# Altium PCB IMU6050-Copy.PcbDoc
Units mm, origin at the board's own origin, x right, y up, seen from the top; angles counter-clockwise.
Board outline 152.4 x 101.6 mm, 2 copper layers (Top Layer, Bottom Layer); 42 components, 29 nets, 166 pads, 13 vias.
Unrouted connection lines stored in the file: 106.
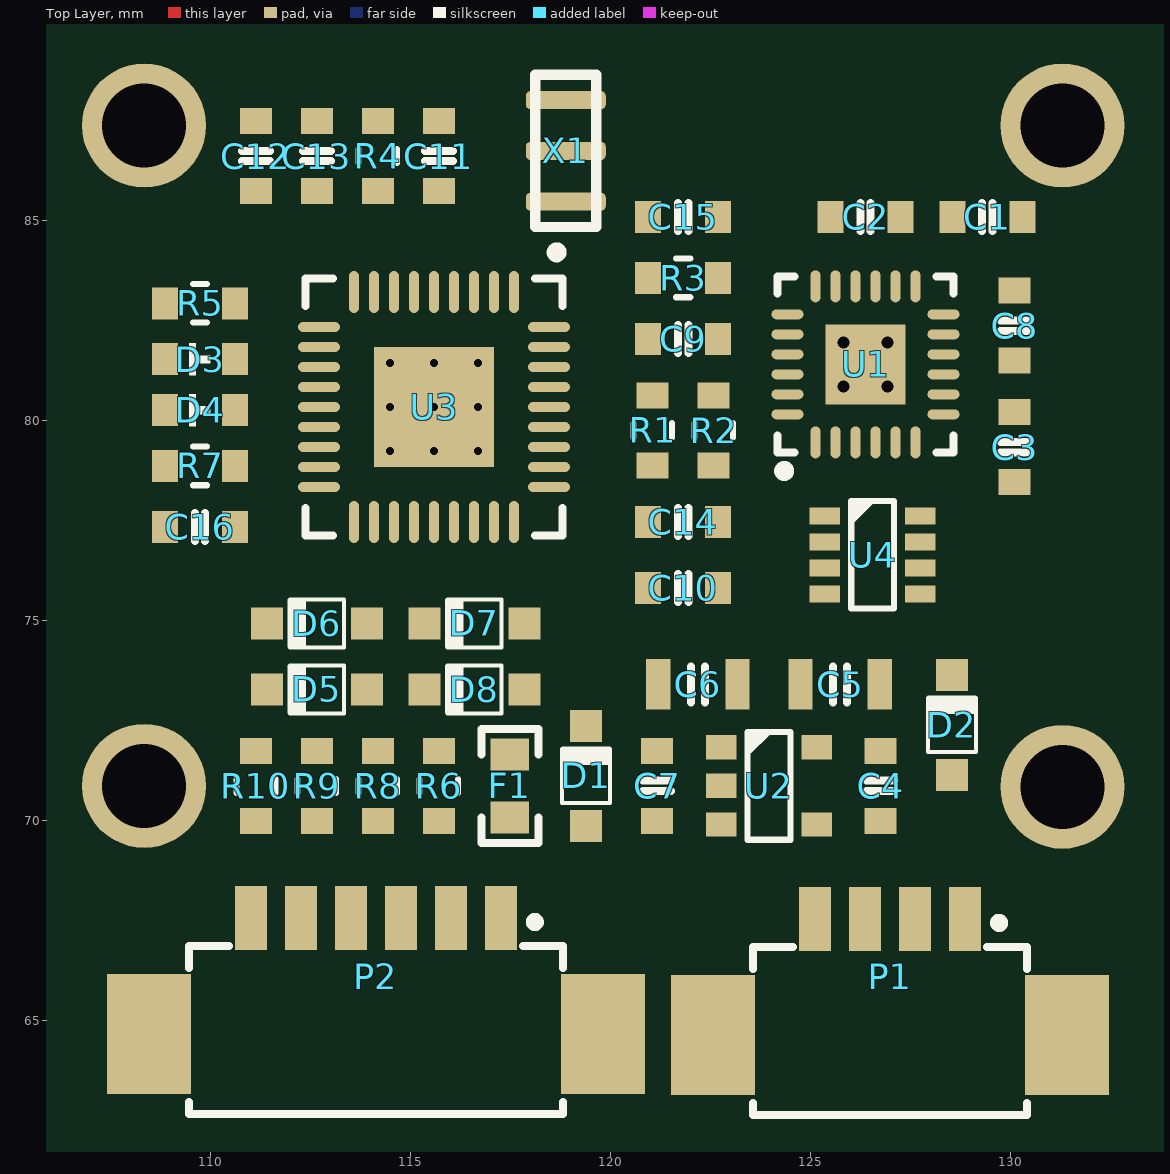
[diagram p0: Top Layer view]
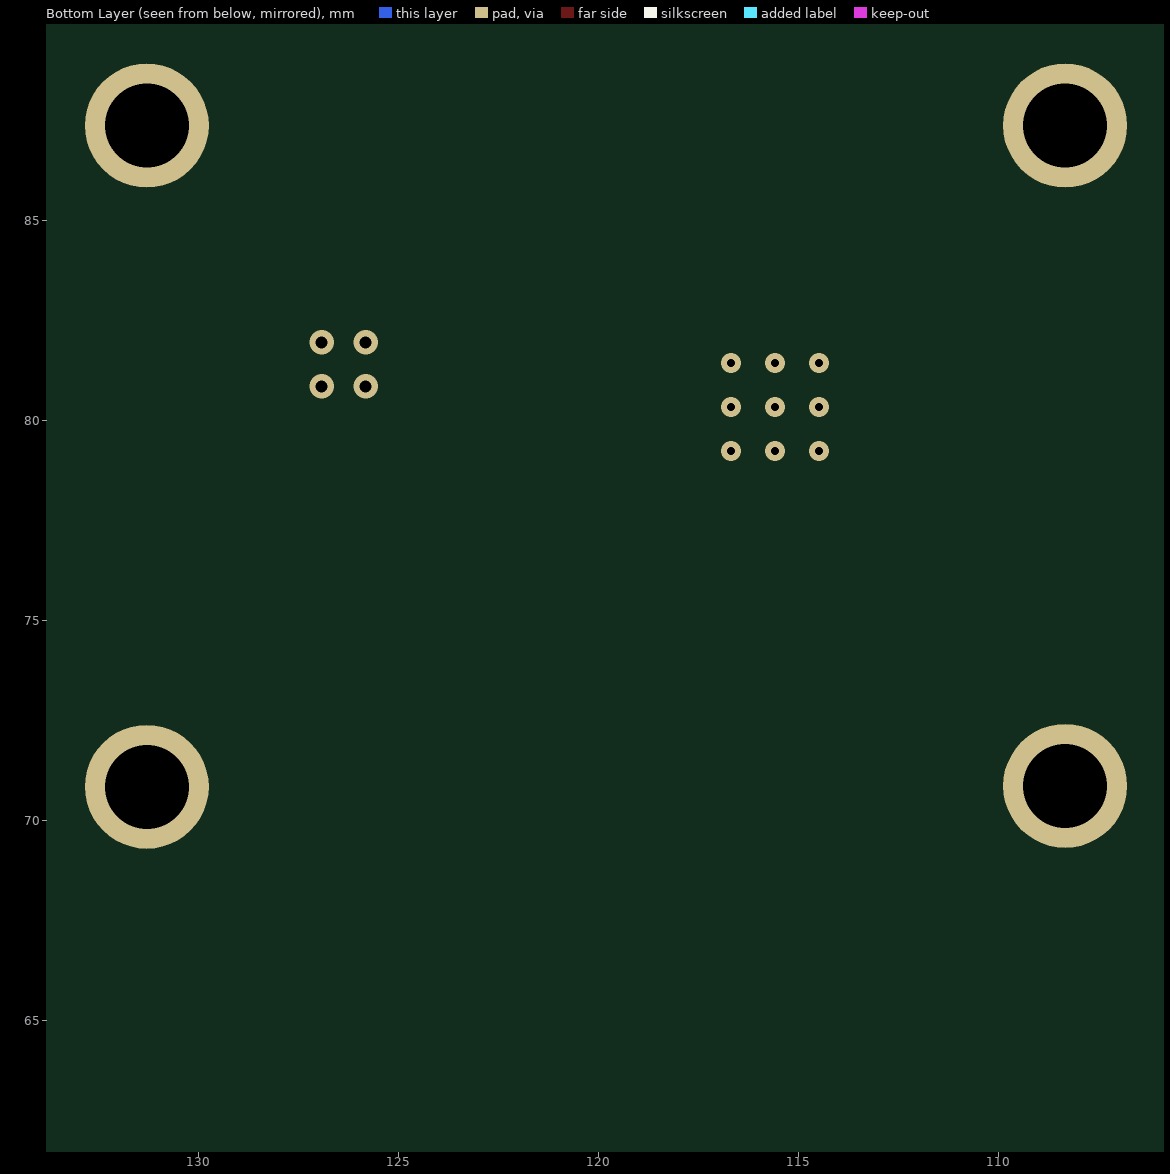
[diagram p1: Bottom Layer view, seen from below]

## Layer stack, top to bottom
Top Solder: solder mask 0.0102, Solder Resist, Dk 3.5
Top Layer: signal copper 0.0356
Dielectric 1: dielectric 0.32, FR-4, Dk 4.8
Bottom Layer: signal copper 0.0356
Bottom Solder: solder mask 0.0102, Solder Resist, Dk 3.5

## Board outline
25.4,25.4 177.8,25.4 177.8,127 25.4,127

## Design rules (kind name [scope] priority, off if disabled: settings)
Clearance [All] p1: gap=0.2
PolygonConnect [All] p1: connectstyle=Relief reliefconductorwidth=0.254 reliefentries=4 polygonreliefangle="90 Angle" airgapwidth=0.254
RoutingVias [All] p1: holewidth=0.711 width=1.27 viastyle="Through Hole" minholewidth=0.711 minwidth=1.27 maxholewidth=0.711 maxwidth=1.27
SolderMaskExpansion [All] p1: expansion=0.102
Width [All] p1: maxlimit=0.254 minlimit=0.254 preferedwidth=0.254
30 further rules are at their usual default settings.

## Components (designator, comment, footprint, x,y, rotation, side; value= is the part's Value field where it differs from the comment)
C1 "105" CAP-0603-L 129.413,85.09 r0 top
C2 "104" CAP-0603-L 126.365,85.09 r0 top
C3 "103" CAP-0603-L 130.094,79.337 r90 top
C4 "104" CAP-0603-L 126.746,70.866 r270 top
C5 "106" CAP-0805-L 125.73,73.406 r0 top
C6 "106" CAP-0805-L 122.174,73.406 r180 top
C7 "104" CAP-0603-L 121.158,70.866 r90 top
C8 "104" CAP-0603-L 130.094,82.371 r270 top
C9 "2.2nF" CAP-0603-L 121.807,82.042 r0 top
C10 "104" CAP-0603-L 121.807,75.819 r0 top
C11 "104" CAP-0603-L 115.697,86.614 r90 top
C12 "105" CAP-0603-L 111.125,86.614 r270 top
C13 "104" CAP-0603-L 112.649,86.614 r270 top
C14 "104" CAP-0603-L 121.807,77.47 r180 top
C15 "104" CAP-0603-L 121.807,85.09 r180 top
C16 "104" CAP-0603-L 109.728,77.343 r0 top
D1 "D5.1" SOD_323 119.38,71.12 r90 top
D2 "D3.9" SOD_323 128.524,72.39 r90 top
D3 "LED_R" LED_0603-L 109.728,81.534 r0 top
D4 "LED_G" LED_0603-L 109.728,80.264 r0 top
D5 "D3.9" SOD_323 112.649,73.279 r180 top
D6 "D3.9" SOD_323 112.649,74.93 r180 top
D7 "D3.9" SOD_323 116.586,74.93 r180 top
D8 "D3.9" SOD_323 116.586,73.279 r180 top
F1 "200mA" R-0603 117.475,70.866 r90 top
P1 "Molex-53261-0471" Molex-53261-0471 128.855,67.543 r0 top
P2 "Molex-53261-0671" Molex-53261-0671 117.248,67.564 r0 top
R1 "10K" R-0603-L 121.045,79.756 r270 top
R2 "10K" R-0603-L 122.569,79.756 r270 top
R3 "10K" R-0603-L 121.807,83.566 r0 top
R4 "10K" R-0603-L 114.173,86.614 r270 top
R5 "4.7K" R-0603-L 109.728,82.931 r180 top
R6 "100R" R-0603-L 115.697,70.866 r90 top
R7 "4.7K" R-0603-L 109.728,78.867 r0 top
R8 "100R" R-0603-L 114.173,70.866 r90 top
R9 "100R" R-0603-L 112.649,70.866 r90 top
R10 "100R" R-0603-L 111.125,70.866 r90 top
U1 "MPU6050" QFN-24-4x4 126.365,81.407 r90 top
U2 "TPS70933DBVR" SOT-23-5 123.952,70.866 r0 top
U3 "STM32F103T8U6" STM-VFQFPN36_N 115.578,80.34 r270 top
U4 "MAX3051" SOT-23-8 125.349,77.612 r0 top
X1 "8MHz" CSTCE_G(A)村田晶振 118.872,86.741 r90 top

## Footprints (in the part's own frame and the unit in brackets; to place one, negate y for a bottom-side part, rotate by r counter-clockwise, add the part's x,y. Pads: shape width x height; smd on the part's side, far side on the other; paste and mask are expansions set on the pad)
CAP-0603-L [mm]
  rect 0.65x0.8 smd: 1(-0.875,0) 2(0.875,0)
  silkscreen extent -0.13,-0.35 0.13,0.35, body extent -0.8,-0.4 0.8,0.4, height 0.8
CAP-0805-L [mil]
  rect 24x50 smd: 1(-39,0) 2(39,0)
  silkscreen extent -7,-18 7,18, body extent -39,-25 39,25, height 39
CSTCE_G(A)村田晶振 [mm]
  rrect50% 0.45x2 smd: 1(1.27,0) 2(0,0) 3(-1.27,0)
  silkscreen extent -1.91,-0.76 1.91,0.76, body extent -1.9,-0.8 1.9,0.8, height 1
LED_0603-L [mm]
  rect 0.65x0.8 smd: 1(-0.875,0) 2(0.875,0)
  silkscreen extent -0.25,-0.39 0.25,0.39, body extent -0.81,-0.4 0.81,0.4, height 0.6
Molex-53261-0471 [mm] "卧式1.25mm Pitch PicoBlade Header"
  rect 0.8x1.6 smd: 1(0,0) 2(-1.25,0) 3(-2.5,0) 4(-3.75,0)
  rect 2.1x3 smd: 5(-6.3,-2.9) 6(2.55,-2.9)
  silkscreen extent -5.3,-4.9 1.55,0, body extent -6.98,-4.97 3.17,0.23, height 3.4
Molex-53261-0671 [mm] "卧式1.25mm Pitch PicoBlade Header"
  rect 0.8x1.6 smd: 1(0,0) 2(-1.25,0) 3(-2.5,0) 4(-3.75,0) 5(-5,0) 6(-6.25,0)
  rect 2.1x3 smd: 7(-8.8,-2.9) 8(2.55,-2.9)
  silkscreen extent -7.8,-4.9 1.55,0, body extent -9.45,-4.94 3.2,0.26, height 3.4
QFN-24-4x4 [mm] "QFN, 24-Leads, Body 4.00x4.00mm, Pitch 0.50mm, Thermal Pad 2.70x2.60mm, IPC Medium Density"
  oval 0.8x0.25 smd: 1(-1.95,1.25) 2(-1.95,0.75) 3(-1.95,0.25) 4(-1.95,-0.25) 5(-1.95,-0.75) 6(-1.95,-1.25) 13(1.95,-1.25) 14(1.95,-0.75) 15(1.95,-0.25) 16(1.95,0.25) 17(1.95,0.75) 18(1.95,1.25)
  oval 0.25x0.8 smd: 7(-1.25,-1.95) 8(-0.75,-1.95) 9(-0.25,-1.95) 10(0.25,-1.95) 11(0.75,-1.95) 12(1.25,-1.95) 19(1.25,1.95) 20(0.75,1.95) 21(0.25,1.95) 22(-0.25,1.95) 23(-0.75,1.95) 24(-1.25,1.95)
  rect 2x2 smd: 25(0,0)
  silkscreen extent -2.79,-2.2 2.2,2.2, body extent -2.07,-2.07 2.07,2.07, height 0.9
R-0603 [mm]
  rect 0.8x0.96 smd: 1(-0.79,0) 2(0.79,0)
  silkscreen extent -1.42,-0.71 1.42,0.71, body extent -0.76,-0.38 0.76,0.38, height 0.41
R-0603-L [mm]
  rect 0.65x0.8 smd: 1(-0.875,0) 2(0.875,0)
  silkscreen extent -0.18,-0.48 0.18,0.48, body extent -0.8,-0.4 0.8,0.4, height 0.45
SOD_323 [mm]
  rect 0.8x0.8 smd: 1(-1.25,0) 2(1.25,0)
  silkscreen extent -0.67,-0.6 0.72,0.6, body extent -1.17,-0.67 1.43,0.67, height 1.1
SOT-23-5 [mil]
  rect 30x24 smd: 1(-47,38) 2(-47,0) 3(-47,-38) 4(47,-38) 5(47,38)
  silkscreen extent -21,-53 21,53, body extent -55,-57 55,57, height 57
SOT-23-8 [mm]
  rect 0.762x0.42 smd: 1(0,0) 2(0,-0.65) 3(0,-1.3) 4(0,-1.95) 5(2.388,-1.95) 6(2.388,-1.3) 7(2.388,-0.65) 8(2.388,0)
  silkscreen extent 0.66,-2.31 1.73,0.38, body extent -0.2,-2.47 2.6,0.47, height 1.2
STM-VFQFPN36_N [mm] "QFN, 36-Leads, Body 6.13x6.13mm, Pitch 0.5mm, Thermal Pad 3x3mm, IPC Medium Density"
  oval 1.05x0.25 smd: 1(-2.875,2) 2(-2.875,1.5) 3(-2.875,1) 4(-2.875,0.5) 5(-2.875,0) 6(-2.875,-0.5) 7(-2.875,-1) 8(-2.875,-1.5) 9(-2.875,-2) 19(2.875,-2) 20(2.875,-1.5) 21(2.875,-1) 22(2.875,-0.5) 23(2.875,0) 24(2.875,0.5) 25(2.875,1) 26(2.875,1.5) 27(2.875,2)
  oval 0.25x1.05 smd: 10(-2,-2.875) 11(-1.5,-2.875) 12(-1,-2.875) 13(-0.5,-2.875) 14(0,-2.875) 15(0.5,-2.875) 16(1,-2.875) 17(1.5,-2.875) 18(2,-2.875) 28(2,2.875) 29(1.5,2.875) 30(1,2.875) 31(0.5,2.875) 32(0,2.875) 33(-0.5,2.875) 34(-1,2.875) 35(-1.5,2.875) 36(-2,2.875)
  rect 3x3 smd: 37(0,0)
  silkscreen extent -3.99,-3.21 3.21,3.21, body extent -3.07,-3.07 3.07,3.07, height 1

## Part data
C1 C2 C3 C4 C5 C6 C7 C8 C9 C10 C11 C12 C13 C14 C15 C16: library part CAP
D1 D2 D5 D6 D7 D8: library part Diode_ZD
D3 D4: library part LED
F1: library part Fuse
P1 P2: "1.25mm Pitch PicoBlade Header"
R1 R2 R3 R4 R5 R6 R7 R8 R9 R10: library part Res
U1: "Sensor Motion"
U2: library part TPS709, "具有使能端的 150-mA 超低 Iq LDO"
U3: "ARM Cortex-M3 32-bit MCU, 64 KB Flash, 20 KB Internal RAM, 26 I/Os, 36-pin VFQFPN, -40 to 85 degC, Tray"
U4: "CAN控制器"
X1: library part XTAL-3215

## Free pads (board coordinates)
  round 3.1 hole 2.1: 0(108.331,70.866) 0(108.331,87.376) 0(131.288,70.845) 0(131.288,87.376)

## Via types
v1: diameter 0.5, hole 0.2, Top Layer to Bottom Layer, 9 vias
v2: diameter 0.606, hole 0.3, Top Layer to Bottom Layer, 4 vias

## Nets (pads, with @x,y where several pads share a name; then routed paths per layer and width w, separated by ;. In a path a pad name is that pad's centre, name@x,y a point inside that pad or via, vN(x,y) a via of type N, cw(c..) or ccw(c..) an arc to the next point about the centre after c; other vN are vias at no path point)
CAN_H: P1.3 U4.7
CAN_L: P1.4 U4.6
CAN_RX: U3.23 U4.4
CAN_TX: U3.24 U4.1
GND: C1.1 C2.1 C3.1 C4.2 C5.1 C6.1 C7.1 C8.1 C9.1 C10.1 C11.1 C12.1 C13.1 C14.1 C15.1 C16.1 D1.1 D2.1 D5.1 D6.1 D7.1 D8.1 P1.2 P1.5 P1.6 P2.2 P2.7 P2.8 R3.2 U1.1 U1.9 U1.11 U1.18 U1.25 U2.2 U3.5 U3.18 U3.26 U3.36 U3.37 U4.2 U4.5 U4.8 X1.2
  other v1: 114.478,79.24 115.578,79.24 116.678,79.24 114.478,80.34 115.578,80.34 116.678,80.34 114.478,81.44 115.578,81.44 116.678,81.44
  other v2: 125.815,80.857 126.915,80.857 125.815,81.957 126.915,81.957
I2C_SCL: R2.1 U1.23 U3.33
I2C_SDA: R1.1 U1.24 U3.34
LED_G: D4.2 U3.17
LED_R: D3.2 U3.16
MPU_INT: U1.12 U3.32
NetC8_2: C8.2 U1.10
NetC9_2: C9.2 U1.20
NetD3_1: D3.1 R5.2
NetD4_1: D4.1 R7.2
NetP2_3: P2.3 R6.1
NetP2_4: P2.4 R8.1
NetP2_5: P2.5 R9.1
NetP2_6: P2.6 R10.1
NetR3_1: R3.1 U3.35
NetU3_2: U3.2 X1.3
NetU3_3: U3.3 X1.1
NRST: C11.2 R4.1 U3.4
SWCLK: D8.2 R6.2 U3.28
SWDIO: D7.2 R8.2 U3.25
USART1_RX: D5.2 R10.2 U3.22
USART1_TX: D6.2 R9.2 U3.21
VCC_3V3: C1.2 C2.2 C3.2 C4.1 C5.2 C10.2 C12.2 C13.2 C14.2 C15.2 C16.2 D2.2 R1.2 R2.2 R4.2 R5.1 R7.1 U1.8 U1.13 U2.5 U3.1 U3.6 U3.19 U3.27 U4.3
VCC_5V: C6.2 C7.2 D1.2 F1.2 U2.1 U2.3
VCC_IN: F1.1 P1.1 P2.1
pads on no net: U1.2 U1.3 U1.4 U1.5 U1.6 U1.7 U1.14 U1.15 U1.16 U1.17 U1.19 U1.21 U1.22 U2.4 U3.7 U3.8 U3.9 U3.10 U3.11 U3.12 U3.13 U3.14 U3.15 U3.20 U3.29 U3.30 U3.31